# EAGLE board PCB (EAGLE 9.7.0)
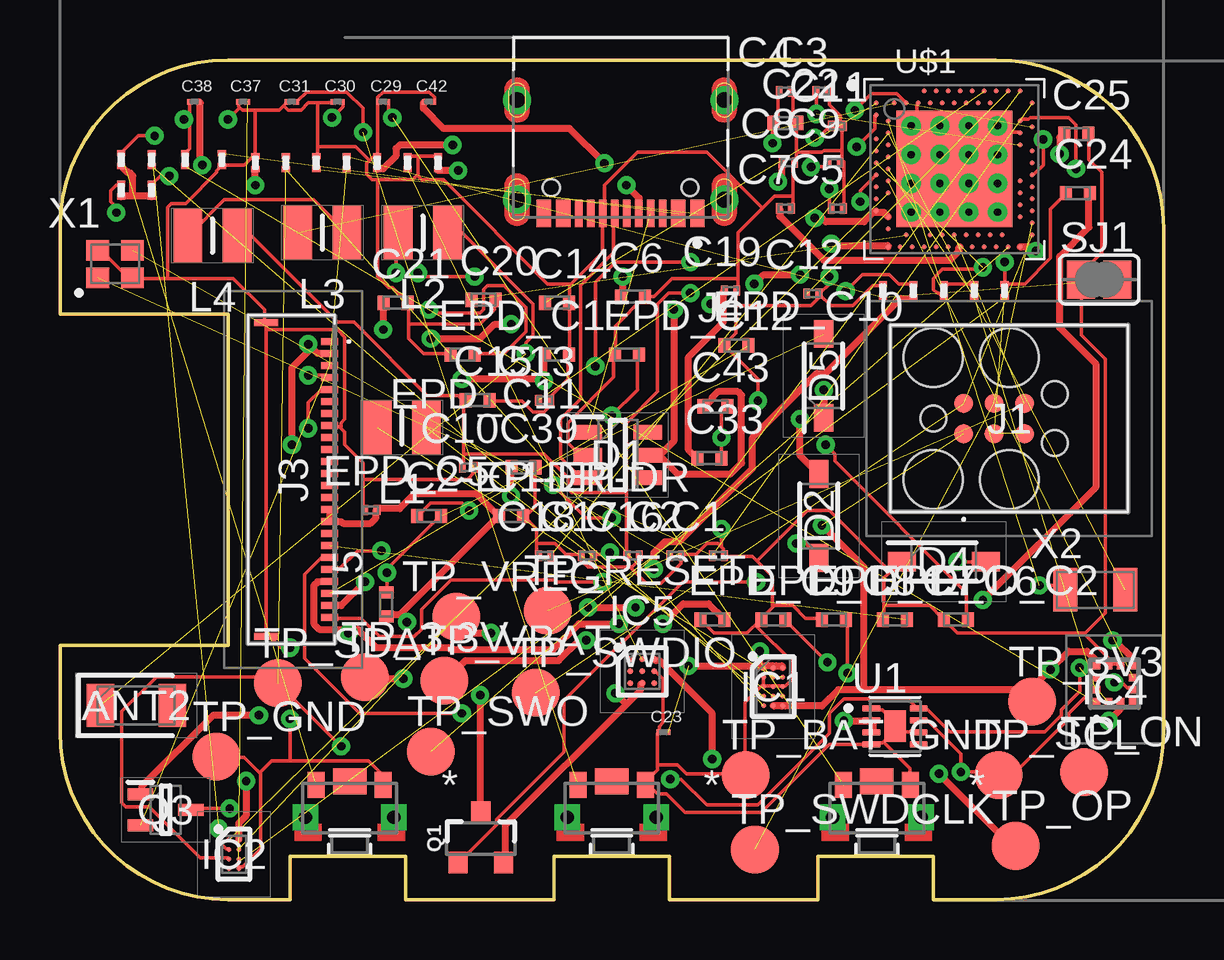
[diagram p0: board, top side]
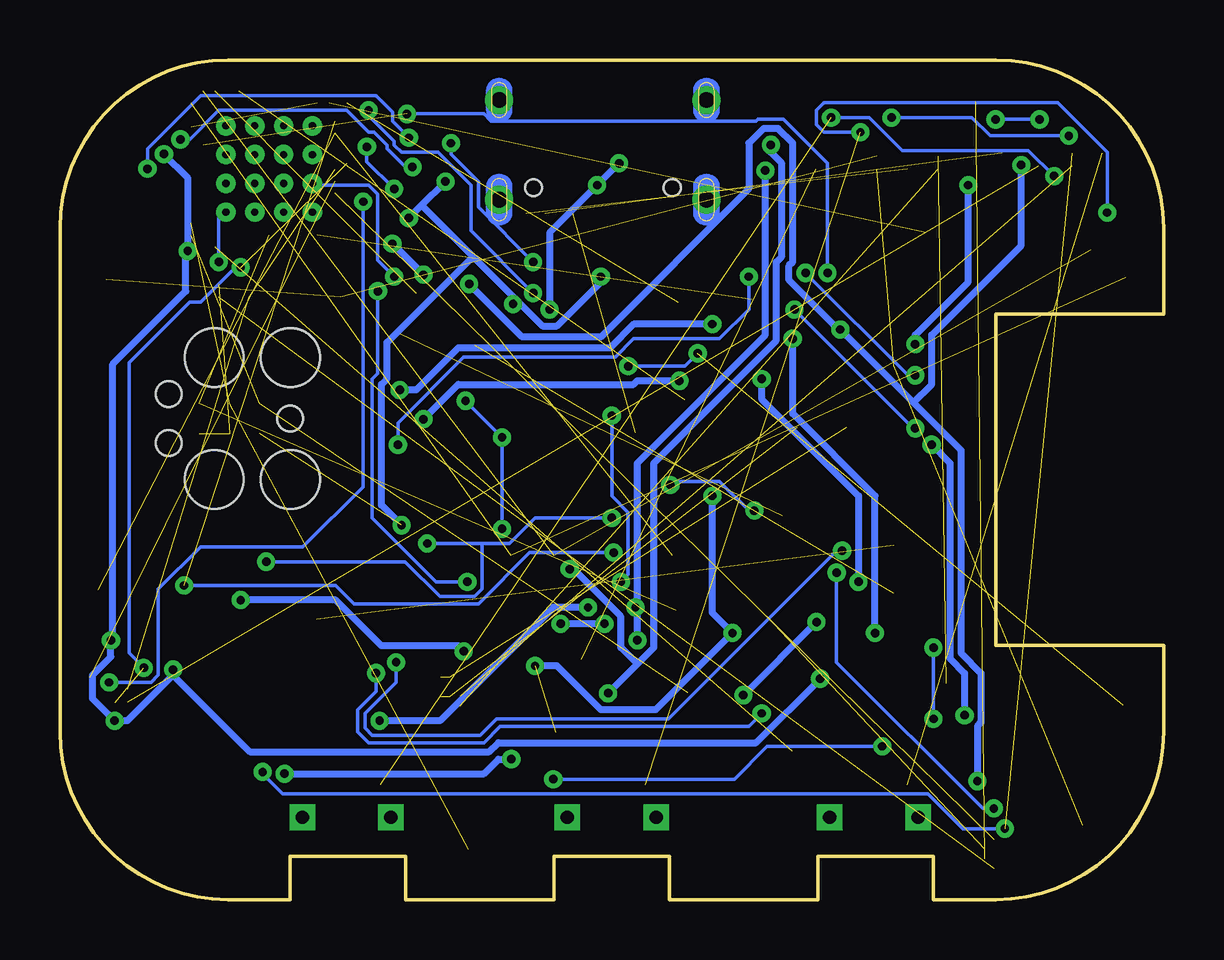
[diagram p1: board, bottom side, seen from below]

Size 46 x 35 mm. Coordinates in mm from the lower left corner, seen from the top.
Outline: 39,0 36.4,0 36.4,1.8 31.6,1.8 31.6,0 25.4,0 25.4,1.8 20.6,1.8 20.6,0 14.4,0 14.4,1.8 9.6,1.8 9.6,0 7,0 arc-90 0,7 0,10.6 7,10.6 7,24.4 0,24.4 0,28 arc-90 7,35 39,35 arc-90 46,28 46,7 arc-90 39,0
Copper layers (1*16): Top 0.035mm / dielectric 1.5mm / Bottom 0.035mm
Design rules "Fusion Electronics Design Rules": minimum track width 6mil, minimum drill 0.35mm, track to track 6mil, track to pad 6mil, pad to pad 6mil, via to via 6mil, smd to smd 6mil, copper to edge 40mil, drill to drill 6mil, minimum pad ring 10mil, minimum via ring 8mil, stop-mask expansion 4mil, vias tented up to drill 9999mil, thermal gap 10mil
Net classes: 1 POWER: width 0.3 mm

## Footprints (pad centres in the part's own frame; a part is rotated, then mirrored left to right if it is on the bottom)
2450AT18B100E_ANTC3216X140N = smd 1.15 x 1.8: 1 -1.5,0; 2 1.5,0
NORDIC_NRF_3_RESC0201_L = smd 0.28 x 0.43: 1 -0.255,0; 2 0.255,0
NORDIC_NRF_3_RESC0402_L = smd 0.5 x 0.6: 1 -0.5,0; 2 0.5,0
GRM011R60J152KE01L_2_CAPC0201X13N = smd 0.22 x 0.23: 1 -0.185,0; 2 0.185,0
GRM011R60J152KE01L_1_0201 = smd 0.35 x 0.25: 1 0,0.275; 2 0,-0.275
ESP32_C6_LIBRARY_3_SOT95P280X145-6N = smd 1.2 x 0.6: 1 -1.25,0.95; 2 -1.25,0; 3 -1.25,-0.95; 4 1.25,-0.95; 5 1.25,0; 6 1.25,0.95
ESP32_C6_LIBRARY_5_SOD3716X135N = smd 1.15 x 0.8: 1 -1.75,0; 2 1.75,0
RT6160AWSC_BGA15C40P3X5_140X230X60 = smd 0.216 x 0.216: A1 -0.4,0.8; A2 0,0.8; A3 0.4,0.8; B1 -0.4,0.4; B2 0,0.4; B3 0.4,0.4; C1 -0.4,0; C2 0,0; C3 0.4,0; D1 -0.4,-0.4; D2 0,-0.4; D3 0.4,-0.4; E1 -0.4,-0.8; E2 0,-0.8; E3 0.4,-0.8
BQ25180YBGR_BGA8C40P2X4_100X155X50 = smd 0.2 x 0.2: A1 -0.2,0.6; A2 0.2,0.6; B1 -0.2,0.2; B2 0.2,0.2; C1 -0.2,-0.2; C2 0.2,-0.2; D1 -0.2,-0.6; D2 0.2,-0.6
BMA423_BMA423 = smd 0.3 x 0.35: 1 -0.75,-0.775; 2 -0.25,-0.775; 3 0.25,-0.775; 4 0.75,-0.775; 7 0.75,0.775; 8 0.25,0.775; 9 -0.25,0.775; 10 -0.75,0.775 | smd 0.35 x 0.3: 5 0.775,-0.25; 6 0.775,0.25; 11 -0.775,0.25; 12 -0.775,-0.25
DRV2605YZFR_BGA9C50P3X3_144X144X62 = smd 0.25 x 0.25: A1 -0.5,0.5; A2 0,0.5; A3 0.5,0.5; B1 -0.5,0; B2 0,0; B3 0.5,0; C1 -0.5,-0.5; C2 0,-0.5; C3 0.5,-0.5
TC2030-IDC_TC2030IDC = smd 0.783 x 0.783: 1 -0.953,-0.635; 2 -0.953,0.635; 3 0.317,-0.635; 4 0.317,0.635; 5 1.588,-0.635; 6 1.588,0.635 | hole 2.451: -2.223,-2.54; -2.223,2.54; 0.952,-2.54; 0.952,2.54 | hole 1.067: -2.223,0; 2.857,-1.016; 2.857,1.016
503480-2400_5034802400 = smd 0.3 x 0.7: 1 -5.75,1.525; 2 -5.25,1.525; 3 -4.75,1.525; 4 -4.25,1.525; 5 -3.75,1.525; 6 -3.25,1.525; 7 -2.75,1.525; 8 -2.25,1.525; 9 -1.75,1.525; 10 -1.25,1.525; 11 -0.75,1.525; 12 -0.25,1.525; 13 0.25,1.525; 14 0.75,1.525; 15 1.25,1.525; 16 1.75,1.525; 17 2.25,1.525; 18 2.75,1.525; 19 3.25,1.525; 20 3.75,1.525; 21 4.25,1.525; 22 4.75,1.525; 23 5.25,1.525; 24 5.75,1.525 | smd 0.3 x 1: MP1 -6.54,-1.125; MP2 6.54,-1.125
KH-TYPE-C-16P_KINGHELM_KH-TYPE-C-16P = smd 0.6 x 1.15: A1_B12 -3.2,4.725; A4_B9 -2.4,4.725; A9_B4 2.4,4.725; A12_B1 3.2,4.725 | smd 0.3 x 1.15: A5 -1.25,4.725; A6 -0.25,4.725; A7 0.25,4.725; A8 1.25,4.725; B5 1.75,4.725; B6 0.75,4.725; B7 -0.75,4.725; B8 -1.75,4.725 | drill 0.65 pad 1.05: SH1 -4.32,0; SH2 4.32,0; SH3 -4.32,4.15; SH4 4.32,4.15 | hole 0.7: -2.89,3.65; 2.89,3.65
MLP2016SR47MT0S1_INDC2016X100N = smd 1.2 x 2.2: 1 -1.028,0; 2 1.028,0
NORDIC_NRF_2_RESC0402_L = smd 0.5 x 0.6: 1 -0.5,0; 2 0.5,0
ESP32_C6_LIBRARY_4_ESP32_C6_LIBRARY_4_ESP32_C6_LIBRARY_4_ESP32_C6_LIBRARY_4_ESP32_WROVER_SPARKFUN-DISCRETESEMI_SOT23-3 = smd 0.8 x 0.9: 1 -0.95,-1; 2 0.95,-1; 3 0,1.1
ESP32_C6_LIBRARY_6_SOT65P210X110-3N = smd 1.05 x 0.5: 1 -1.05,0.65; 2 -1.05,-0.65; 3 1.05,0
CPF0201D7K68C1_0201 = smd 0.35 x 0.25: 1 0,0.275; 2 0,-0.275
ESP32_C6_LIBRARY_7_JUMPER_SJ = smd 1.168 x 1.6: 1 -0.762,0; 2 0.762,0
2025-10-22_07-23-44_LIBRARY_SW_EVP-AKE31A_PAN = smd 0.711 x 1.092: 1 -1.4,-0.972; 2 1.4,-0.972 | drill 0.559 pad 0.914 square: 3 -1.848,0.381; 4 1.848,0.381 | smd 1.397 x 1.092: 5 0,-1.124
HECTOR_WATCH_1_TP20R = smd 2 x 2: TP 0,0
ESP32_C6_LIBRARY_SON50P200X200X80-9N = smd 0.76 x 0.27: 1 -0.985,0.75; 2 -0.985,0.25; 3 -0.985,-0.25; 4 -0.985,-0.75; 5 0.985,-0.75; 6 0.985,-0.25; 7 0.985,0.25; 8 0.985,0.75 | smd 0.9 x 1.3: 9 0,0
NORDIC_NRF_4_AQFN50P700X700X85_HS-74N = smd 4.85 x 4.85: P$74 0,0 | drill 0.3 pad 0.6: P$75 -1.8,1.8; P$76 -0.6,1.8; P$77 0.6,1.8; P$78 1.8,1.8; P$79 -1.8,0.6; P$80 -0.6,0.6; P$81 0.6,0.6; P$82 1.8,0.6; P$83 -1.8,-0.6; P$84 -0.6,-0.6; P$85 0.6,-0.6; P$86 1.8,-0.6; P$87 -1.8,-1.8; P$88 -0.6,-1.8; P$89 0.6,-1.8; P$90 1.8,-1.8 | smd 0.2 x 0.2: P$A8 -1.25,3.25; P$A10 -0.75,3.25; P$A12 -0.25,3.25; P$A14 0.25,3.25; P$A16 0.75,3.25; P$A18 1.25,3.25; P$A20 1.75,3.25; P$A22 2.25,3.25; P$A23 2.75,3.25; P$AA24 3.25,-2.25; P$AB2 -2.75,-2.5; P$AC5 -2,-2.75; P$AC9 -1,-2.75; P$AC11 -0.5,-2.75; P$AC13 0,-2.75; P$AC15 0.5,-2.75; P$AC17 1,-2.75; P$AC19 1.5,-2.75; P$AC21 2,-2.75; P$AC24 3.25,-2.75; P$AD2 -2.75,-3.25; P$AD4 -2.25,-3.25; P$AD6 -1.75,-3.25; P$AD8 -1.25,-3.25; P$AD10 -0.75,-3.25; P$AD12 -0.25,-3.25; P$AD14 0.25,-3.25; P$AD16 0.75,-3.25; P$AD18 1.25,-3.25; P$AD20 1.75,-3.25; P$AD22 2.25,-3.25; P$AD23 2.75,-3.25; P$B1 -3.25,2.75; P$B3 -2.5,2.75; P$B5 -2,2.75; P$B7 -1.5,2.75; P$B9 -1,2.75; P$B11 -0.5,2.75; P$B13 0,2.75; P$B15 0.5,2.75; P$B17 1,2.75; P$B19 1.5,2.75; P$B24 3.25,2.75; P$C1 -3.25,2.25; P$D2 -2.75,2; P$D23 2.75,2; P$E24 3.25,1.75; P$F2 -2.75,1.5; P$F23 2.75,1.5; P$G1 -3.25,1.25; P$H2 -2.75,1; P$H23 2.75,1; P$J1 -3.25,0.75; P$J24 3.25,0.75; P$K2 -2.75,0.5; P$L1 -3.25,0.25; P$L24 3.25,0.25; P$M2 -2.75,0; P$N1 -3.25,-0.25; P$N24 3.25,-0.25; P$P2 -2.75,-0.5; P$P23 2.75,-0.5; P$R1 -3.25,-0.75; P$R24 3.25,-0.75; P$T2 -2.75,-1; P$T23 2.75,-1; P$U1 -3.25,-1.25; P$U24 3.25,-1.25; P$V23 2.75,-1.5; P$W1 -3.25,-1.75; P$W24 3.25,-1.75; P$Y2 -2.75,-2; P$Y23 2.75,-2
NORDIC_NRF_BT-XTAL_2016_N = smd 0.95 x 0.85: 1 -0.725,-0.575; 2 0.725,-0.575; 3 0.725,0.575; 4 -0.725,0.575
NORDIC_NRF_1_XTAL_3215_N = smd 1 x 1.8: 1 -1.25,0; 2 1.25,0

## Placement (x,y rotation side)
ANT2  2450AT18B100E_2450AT18B100E  [2450AT18B100E_ANTC3216X140N]  3.18,8.09 0 top
C1  12pF  [NORDIC_NRF_3_RESC0201_L]  27.44,14.34 0 top
C1-EP-DR  10uF  [NORDIC_NRF_3_RESC0402_L]  18.81,15.99 0 top
C2  12pF  [NORDIC_NRF_3_RESC0201_L]  25.67,14.34 0 top
C2-EP-DR  4.7uF/25V  [NORDIC_NRF_3_RESC0402_L]  15.38,15.99 0 top
C3  1pF  [NORDIC_NRF_3_RESC0201_L]  31.76,33.69 0 top
C4  1pF  [NORDIC_NRF_3_RESC0201_L]  30.24,33.69 0 top
C5  100nF  [NORDIC_NRF_3_RESC0201_L]  32.4,28.81 0 top
C6  4.7uF  [NORDIC_NRF_3_RESC0402_L]  23.89,25.13 0 top
C7  100nF  [NORDIC_NRF_3_RESC0201_L]  30.24,28.81 0 top
C8  100nF  [NORDIC_NRF_3_RESC0201_L]  30.36,30.72 0 top
C9  820pF  [NORDIC_NRF_3_RESC0201_L]  32.27,30.72 0 top
C10  N.C  [NORDIC_NRF_3_RESC0201_L]  17.03,18.02 0 top
C11  100pF  [NORDIC_NRF_3_RESC0201_L]  32.4,32.24 0 top
C12  100nF  [NORDIC_NRF_3_RESC0201_L]  31.38,25.26 0 top
C13  N.C  [NORDIC_NRF_3_RESC0201_L]  20.21,20.81 0 top
C14  4.7uF  [NORDIC_NRF_3_RESC0402_L]  20.71,24.88 0 top
C15  1uF  [NORDIC_NRF_3_RESC0402_L]  17.41,20.81 0 top
C16  47nF  [NORDIC_NRF_3_RESC0201_L]  23.89,14.34 0 top
C17  12pF  [NORDIC_NRF_3_RESC0201_L]  21.98,14.34 0 top
C18  12pF  [NORDIC_NRF_3_RESC0201_L]  20.21,14.34 0 top
C19  100nF  [NORDIC_NRF_3_RESC0201_L]  27.95,25.39 0 top
C20  4.7uF  [NORDIC_NRF_3_RESC0402_L]  17.67,25.01 0 top
C21  4.7uF  [NORDIC_NRF_3_RESC0402_L]  13.98,24.88 0 top
C22  N.C  [NORDIC_NRF_3_RESC0402_L]  30.24,32.37 0 top
C23  0.1uF  [GRM011R60J152KE01L_2_CAPC0201X13N]  25.16,6.97 0 top
C24  10uF  [NORDIC_NRF_3_RESC0402_L]  42.43,29.45 0 top
C25  22uF  [NORDIC_NRF_3_RESC0402_L]  42.36,31.92 0 top
C27  0.1uF  [GRM011R60J152KE01L_1_0201]  15.76,30.72 0 top
C29  1uF  [GRM011R60J152KE01L_2_CAPC0201X13N]  13.47,33.26 0 top
C30  1uF  [GRM011R60J152KE01L_2_CAPC0201X13N]  11.57,33.26 0 top
C31  1uF  [GRM011R60J152KE01L_2_CAPC0201X13N]  9.66,33.26 0 top
C32  1uF  [GRM011R60J152KE01L_1_0201]  14.49,30.72 0 top
C33  22uF  [NORDIC_NRF_3_RESC0402_L]  27.06,18.4 0 top
C34  0.1uF  [GRM011R60J152KE01L_1_0201]  13.22,30.72 0 top
C37  1uF  [GRM011R60J152KE01L_2_CAPC0201X13N]  7.63,33.26 0 top
C38  1uF  [GRM011R60J152KE01L_2_CAPC0201X13N]  5.6,33.26 0 top
C39  10uF  [NORDIC_NRF_3_RESC0402_L]  19.32,18.02 0 top
C42  0.1uF  [GRM011R60J152KE01L_2_CAPC0201X13N]  15.38,33.26 0 top
C43  4.7uF\  [NORDIC_NRF_3_RESC0402_L]  27.32,20.56 0 top
D1  ESP32_C6_LIBRARY_3_USBLC6-2SC6Y  [ESP32_C6_LIBRARY_3_SOT95P280X145-6N]  23.25,18.53 0 top
D2  MBR0530  [ESP32_C6_LIBRARY_5_SOD3716X135N]  31.64,15.99 90 top
D4  MBR0530  [ESP32_C6_LIBRARY_5_SOD3716X135N]  36.84,14.08 0 top
D5  MBR0530  [ESP32_C6_LIBRARY_5_SOD3716X135N]  31.83,21.83 90 top
EPD_C1  1uF/50V  [NORDIC_NRF_3_RESC0402_L]  16.78,22.72 0 top
EPD_C2  1uF/50V  [NORDIC_NRF_3_RESC0402_L]  37.35,11.67 0 top
EPD_C5  0.1uF/50V  [NORDIC_NRF_3_RESC0201_L]  12.97,16.24 0 top
EPD_C6  1uF/50V  [NORDIC_NRF_3_RESC0402_L]  34.81,11.67 0 top
EPD_C7  1uF/50V  [NORDIC_NRF_3_RESC0402_L]  32.27,11.67 0 top
EPD_C8  1uF/50V  [NORDIC_NRF_3_RESC0402_L]  29.73,11.67 0 top
EPD_C9  1uF/50V  [NORDIC_NRF_3_RESC0402_L]  27.19,11.67 0 top
EPD_C10  1uF/50V  [NORDIC_NRF_3_RESC0402_L]  28.21,23.1 0 top
EPD_C11  1uF/50V  [NORDIC_NRF_3_RESC0402_L]  20.71,22.72 180 top
EPD_C12  1uF/50V  [NORDIC_NRF_3_RESC0402_L]  23.63,22.72 0 top
IC1  RT6160AWSC_RT6160AWSC  [RT6160AWSC_BGA15C40P3X5_140X230X60]  29.73,8.88 0 top
IC2  BQ25180YBGR_BQ25180YBGR  [BQ25180YBGR_BGA8C40P2X4_100X155X50]  7.25,1.89 0 top
IC4  BMA423_BMA423  [BMA423_BMA423]  43.96,9 0 top
IC5  DRV2605YZFR_DRV2605YZFR  [DRV2605YZFR_BGA9C50P3X3_144X144X62]  24.27,9.51 0 top
J1  TC2030-IDC_TC2030-IDC  [TC2030-IDC_TC2030IDC]  38.62,20.05 0 top
J3  503480-2400_503480-2400  [503480-2400_5034802400]  9.72,17.51 270 top
J4  KH-TYPE-C-16P_KH-TYPE-C-16PUSB  [KH-TYPE-C-16P_KINGHELM_KH-TYPE-C-16P]  23.37,33.33 180 top
L1  MLP2016SR47MT0S1_FTC252012SR47MBCA  [MLP2016SR47MT0S1_INDC2016X100N]  14.25,19.67 0 top
L2  3.9nH  [MLP2016SR47MT0S1_INDC2016X100N]  15.13,27.8 0 top
L3  10uH  [MLP2016SR47MT0S1_INDC2016X100N]  10.93,27.8 0 top
L4  15nH  [MLP2016SR47MT0S1_INDC2016X100N]  6.36,27.67 0 top
L5  68uH  [NORDIC_NRF_2_RESC0402_L]  13.6,12.31 90 top
Q1  20V/4.2A/52mΩ/1.4W  [ESP32_C6_LIBRARY_4_ESP32_C6_LIBRARY_4_ESP32_C6_LIBRARY_4_ESP32_C6_LIBRARY_4_ESP32_WROVER_SPARKFUN-DISCRETESEMI_SOT23-3]  17.54,2.54 0 top
Q3  SI1308EDL-T1-GE3  [ESP32_C6_LIBRARY_6_SOT65P210X110-3N]  4.41,3.75 0 top
R1_EP_DR  0.47  [CPF0201D7K68C1_0201]  11.95,30.72 0 top
R1_USB  5K1  [CPF0201D7K68C1_0201]  10.68,30.72 0 top
R2  0  [CPF0201D7K68C1_0201]  9.41,30.72 0 top
R2_EP_DR  10K  [CPF0201D7K68C1_0201]  8.14,30.72 0 top
R2_USB  5K1  [CPF0201D7K68C1_0201]  6.74,30.85 0 top
R3  0  [CPF0201D7K68C1_0201]  5.22,30.85 0 top
R4  0  [CPF0201D7K68C1_0201]  3.82,30.85 0 top
R5  10K  [CPF0201D7K68C1_0201]  2.55,30.85 0 top
R7  10K  [CPF0201D7K68C1_0201]  3.82,29.58 0 top
R8  10K  [CPF0201D7K68C1_0201]  2.55,29.58 0 top
R9  10K  [CPF0201D7K68C1_0201]  39.38,25.39 0 top
R17  3K3  [CPF0201D7K68C1_0201]  38.11,25.39 0 top
R18  3K3\  [CPF0201D7K68C1_0201]  36.84,25.39 0 top
R_PWR_EPD  10K  [CPF0201D7K68C1_0201]  35.57,25.39 0 top
R_TYPE_SEL  2.2  [CPF0201D7K68C1_0201]  34.3,25.39 0 top
SJ1  0  [ESP32_C6_LIBRARY_7_JUMPER_SJ]  43.32,25.84 0 top
SW_DN  2025-10-22_07-23-44_LIBRARY_EVP-AKE31ASW_EVP-AKE31A_PAN  [2025-10-22_07-23-44_LIBRARY_SW_EVP-AKE31A_PAN]  34.05,3.81 180 top
SW_ENT  2025-10-22_07-23-44_LIBRARY_EVP-AKE31ASW_EVP-AKE31A_PAN  [2025-10-22_07-23-44_LIBRARY_SW_EVP-AKE31A_PAN]  23,3.81 180 top
SW_UP  2025-10-22_07-23-44_LIBRARY_EVP-AKE31ASW_EVP-AKE31A_PAN  [2025-10-22_07-23-44_LIBRARY_SW_EVP-AKE31A_PAN]  12.08,3.81 180 top
TP_3.3V  HECTOR_WATCH_1_TPTP20R  [HECTOR_WATCH_1_TP20R]  12.71,9.27 0 top
TP_3V3  HECTOR_WATCH_1_TPTP20R  [HECTOR_WATCH_1_TP20R]  40.53,8.24 0 top
TP_BAT_GND  HECTOR_WATCH_1_TPTP20R  [HECTOR_WATCH_1_TP20R]  28.59,5.19 0 top
TP_GND  HECTOR_WATCH_1_TPTP20R  [HECTOR_WATCH_1_TP20R]  6.52,5.95 0 top
TP_ON  HECTOR_WATCH_1_TPTP20R  [HECTOR_WATCH_1_TP20R]  42.68,5.32 0 top
TP_OP  HECTOR_WATCH_1_TPTP20R  [HECTOR_WATCH_1_TP20R]  39.83,2.24 0 top
TP_RESET  HECTOR_WATCH_1_TPTP20R  [HECTOR_WATCH_1_TP20R]  20.33,12.05 0 top
TP_SCL  HECTOR_WATCH_1_TPTP20R  [HECTOR_WATCH_1_TP20R]  39.13,5.19 0 top
TP_SDA  HECTOR_WATCH_1_TPTP20R  [HECTOR_WATCH_1_TP20R]  9.08,9.02 0 top
TP_SWDCLK  HECTOR_WATCH_1_TPTP20R  [HECTOR_WATCH_1_TP20R]  28.97,2.09 0 top
TP_SWDIO  HECTOR_WATCH_1_TPTP20R  [HECTOR_WATCH_1_TP20R]  19.82,8.62 0 top
TP_SWO  HECTOR_WATCH_1_TPTP20R  [HECTOR_WATCH_1_TP20R]  15.47,6.17 0 top
TP_VBAT  HECTOR_WATCH_1_TPTP20R  [HECTOR_WATCH_1_TP20R]  16.01,9.13 0 top
TP_VREG  HECTOR_WATCH_1_TPTP20R  [HECTOR_WATCH_1_TP20R]  16.52,11.8 0 top
U1  ESP32_C6_LIBRARY_MAX17048G+T10  [ESP32_C6_LIBRARY_SON50P200X200X80-9N]  34.81,7.23 0 top
U$1  NORDIC_NRF_4_NRF52840_QF  [NORDIC_NRF_4_AQFN50P700X700X85_HS-74N]  37.28,30.46 0 top
X1  32MHz  [NORDIC_NRF_BT-XTAL_2016_N]  2.3,26.49 0 top
X2  32.768KHz  [NORDIC_NRF_1_XTAL_3215_N]  43.16,12.91 0 top

## Library data of the parts
ANT2 = InkTime_v5; ARROW_PART_NUMBER: 2450AT18B100E; ARROW_PRICE-STOCK: https://www.arrow.com/en/products/2450at18b100e/johanson-dielectrics?utm_currency=USD&region=nac; DESCRIPTION: Antennas 2.45GHz ANTENNA; HEIGHT: 1.4mm; MANUFACTURER_NAME: JOHANSON TECHNOLOGY; MANUFACTURER_PART_NUMBER: 2450AT18B100E; MOUSER_PART_NUMBER: 609-2450AT18B100E; MOUSER_PRICE-STOCK: https://www.mouser.co.uk/ProductDetail/Johanson-Technology/2450AT18B100E?qs=yCnrNFeXz%252Bh5MFsFIXGZGA%3D%3D
C1 C1-EP-DR C2 C2-EP-DR C3-C22 C24 C25 C27 C32-C34 C39 C43 EPD_C1 EPD_C2 EPD_C5-EPD_C12 J4 L5 R1_EP_DR R1_USB R2 R2_EP_DR R2_USB R3-R5 R7-R9 R17 R18 R_PWR_EPD R_TYPE_SEL SJ1 TP_3.3V TP_3V3 TP_BAT_GND TP_GND TP_ON TP_OP TP_RESET TP_SCL TP_SDA TP_SWDCLK TP_SWDIO TP_SWO TP_VBAT TP_VREG U$1 X1 X2 = InkTime_v5
C23 C29-C31 C37 C38 C42 = InkTime_v5; AVAILABILITY: In Stock; CHECK_PRICES: https://www.snapeda.com/parts/GRM011R60J152KE01L/Murata/view-part/?ref=eda; DESCRIPTION: SMD Capacitor X5R(EIA) with Capacitance: 1500pF Tol. 10%. Rated Voltage: 6.3Vdc; MF: Murata; MP: GRM011R60J152KE01L; PACKAGE: 0201 Murata; PRICE: None; SNAPEDA_LINK: https://www.snapeda.com/parts/GRM011R60J152KE01L/Murata/view-part/?ref=snap
D1 = InkTime_v5; AVAILABILITY: In Stock; CHECK_PRICES: https://www.snapeda.com/parts/USBLC6-2SC6Y/STMicroelectronics/view-part/?ref=eda; DESCRIPTION: 17V Clamp 5A (8/20µs) Ipp Tvs Diode Surface Mount SOT-23-6; MF: STMicroelectronics; MP: USBLC6-2SC6Y; PACKAGE: SOT-23-6 STMicroelectronics; PRICE: None; SNAPEDA_LINK: https://www.snapeda.com/parts/USBLC6-2SC6Y/STMicroelectronics/view-part/?ref=snap
D2 D4 D5 = InkTime_v5; AVAILABILITY: In Stock; CHECK_PRICES: https://www.snapeda.com/parts/MBR0530/Onsemi/view-part/?ref=eda; DESCRIPTION: Diode Schottky 30 V 500mA Surface Mount SOD-123; MF: ON Semiconductor; MP: MBR0530; PACKAGE: SOD-123-2 ON Semiconductor; PRICE: None; PURCHASE-URL: https://www.snapeda.com/api/url_track_click_mouser/?unipart_id=179458&manufacturer=ON Semiconductor&part_name=MBR0530&search_term=None; SNAPEDA_LINK: https://www.snapeda.com/parts/MBR0530/Onsemi/view-part/?ref=snap
IC1 = InkTime_v5; DESCRIPTION: Buck-Boost Regulator Positive Output Step-Up/Step-Down I2C DC-DC Controller IC 15-WL-CSP (BSC) (1.4x2.3); HEIGHT: 0.6mm; MANUFACTURER_NAME: RICHTEK; MANUFACTURER_PART_NUMBER: RT6160AWSC; MOUSER_PART_NUMBER: 835-RT6160AWSC; MOUSER_PRICE-STOCK: https://www.mouser.co.uk/ProductDetail/Richtek/RT6160AWSC?qs=amGC7iS6iy%2FLd9PSoixZXQ%3D%3D
IC2 = InkTime_v5; ARROW_PART_NUMBER: BQ25180YBGR; ARROW_PRICE-STOCK: https://www.arrow.com/en/products/bq25180ybgr/texas-instruments?utm_currency=USD&region=nac; DESCRIPTION: Charger IC Lithium Ion/Polymer, Lithium Iron Phosphate 8-DSBGA (1.6x1.1); HEIGHT: 0.5mm; MANUFACTURER_NAME: Texas Instruments; MANUFACTURER_PART_NUMBER: BQ25180YBGR; MOUSER_PART_NUMBER: 595-BQ25180YBGR; MOUSER_PRICE-STOCK: https://www.mouser.co.uk/ProductDetail/Texas-Instruments/BQ25180YBGR?qs=doiCPypUmgEWjAK%252BJAX6Tw%3D%3D
IC4 = InkTime_v5; ARROW_PART_NUMBER: BMA423; ARROW_PRICE-STOCK: https://www.arrow.com/en/products/bma423/bosch; DESCRIPTION: Accelerometers Triaxial low-g 12bit Acceleration Sensor; HEIGHT: 1mm; MANUFACTURER_NAME: BOSCH; MANUFACTURER_PART_NUMBER: BMA423; MOUSER_PART_NUMBER: 262-BMA423; MOUSER_PRICE-STOCK: https://www.mouser.co.uk/ProductDetail/Bosch-Sensortec/BMA423?qs=HXFqYaX1Q2xC%252BSgeGoX3mg%3D%3D
IC5 = InkTime_v5; ARROW_PART_NUMBER: DRV2605YZFR; ARROW_PRICE-STOCK: https://www.arrow.com/en/products/drv2605yzfr/texas-instruments?region=nac; DESCRIPTION: Haptic Driver for ERM/LRA with Built-In Library and Smart Loop Architecture; HEIGHT: 0.625mm; MANUFACTURER_NAME: Texas Instruments; MANUFACTURER_PART_NUMBER: DRV2605YZFR
J1 = InkTime_v5; DESCRIPTION: CABLE ADAPTER 6 POS; HEIGHT: 19mm; MANUFACTURER_NAME: Tag Connect; MANUFACTURER_PART_NUMBER: TC2030-IDC
J3 = InkTime_v5; DESCRIPTION: FFC & FPC Connectors 0.5mm FPC RA SMT Dual Contact 24Ckt; HEIGHT: 1.87mm; MANUFACTURER_NAME: Molex; MANUFACTURER_PART_NUMBER: 503480-2400; MOUSER_PART_NUMBER: 538-503480-2400; MOUSER_PRICE-STOCK: https://www.mouser.co.uk/ProductDetail/Molex/503480-2400?qs=OAhjpuo3Vu7efIoxFh9AOw%3D%3D
L1-L4 = InkTime_v5; DESCRIPTION: SMD / SMT Inductors (Coils), L=0.47?H, L x W x T :; HEIGHT: 1mm; JLCPCB: https://jlcpcb.com/partdetail/6763488-FTC252012SR47MBCA/C5832368; MANUFACTURER_NAME: TDK; MANUFACTURER_PART_NUMBER: FTC252012SR47MBCA
Q1 = InkTime_v5; PROD_ID: TRAN-14388
Q3 = InkTime_v5; AVAILABILITY: In Stock; CHECK_PRICES: https://www.snapeda.com/parts/SI1308EDL-T1-GE3/Vishay+Siliconix/view-part/?ref=eda; DESCRIPTION: Si1308EDL-T1-GE3 N-channel MOSFET Transistor, 1.5 A, 30 V, 3-Pin SC-70 | Siliconix / Vishay SI1308EDL-T1-GE3; MF: Vishay Siliconix; MP: SI1308EDL-T1-GE3; PACKAGE: SOT-323 Vishay Semiconductor; PRICE: None; PURCHASE-URL: https://www.snapeda.com/api/url_track_click_mouser/?unipart_id=274603&manufacturer=Vishay Siliconix&part_name=SI1308EDL-T1-GE3&search_term=None; SNAPEDA_LINK: https://www.snapeda.com/parts/SI1308EDL-T1-GE3/Vishay+Siliconix/view-part/?ref=snap
SW_DN SW_ENT SW_UP = InkTime_v5; COPYRIGHT: Copyright (C) 2025 Ultra Librarian. All rights reserved.; DIGI-KEY_PART_NUMBER_1: P123437TR-ND; DIGI-KEY_PART_NUMBER_2: P123437CT-ND; DIGI-KEY_PART_NUMBER_3: P123437DKR-ND; MANUFACTURER_NAME: Panasonic; MANUFACTURER_PART_NUMBER: EVP-AKE31A
U1 = InkTime_v5; AVAILABILITY: In Stock; CHECK_PRICES: https://www.snapeda.com/parts/MAX17048G+T10/Analog+Devices/view-part/?ref=eda; DESCRIPTION: 3µA 1-Cell/2-Cell Fuel Gauge with ModelGauge; MF: Analog Devices; MP: MAX17048G+T10; PACKAGE: TDFN-8 Maxim; PRICE: None; PURCHASE-URL: https://www.snapeda.com/api/url_track_click_mouser/?unipart_id=329239&manufacturer=Analog Devices&part_name=MAX17048G+T10&search_term=None; SNAPEDA_LINK: https://www.snapeda.com/parts/MAX17048G+T10/Analog+Devices/view-part/?ref=snap

## Nets
3V3/1.7D [POWER]: C34.2 IC5.C2 Q1.2 R_PWR_EPD.2
3V3/1.7D1 [POWER]: R5.2 R7.2 R8.2
3V3/2.4A [POWER]: C6.1 C8.1 C19.1 C25.1 C33.1 IC1.E2 IC1.E3 IC4.3 IC4.7 IC4.10 J1.1 TP_3.3V.TP TP_3V3.TP U$1.P$AD23 U$1.P$W1 U$1.P$Y2
ALERT/1.6C: U1.5
ALERT/2.5C: U$1.P$J24
D+/1.5D: D1.4
D+/2.7D: U$1.P$AD6
D-/1.5D: D1.6
D-/2.7D: U$1.P$AD4
DEC1: C5.1 U$1.P$C1
DEC4_6: C10.1 C15.1 C16.1 L4.2 U$1.P$B5 U$1.P$E24
DN: D1.1 J4.A5
DP: D1.3 J4.A7
EPD_3V3 [POWER]: C1-EP-DR.1 EPD_C5.2 J3.15 J3.16 L5.1 Q1.3
EPD_BUSY/1.5D: J3.9
EPD_BUSY/2.2D: U$1.P$AD12
EPD_CS/1.4C: J3.12
EPD_CS/2.2D: U$1.P$K2
EPD_DC/1.5D: J3.11
EPD_DC/2.2D: U$1.P$AD10
EPD_RST/1.5D: J3.10
EPD_RST/2.2D: U$1.P$AC11
GDR [POWER]: J3.2 Q3.1 R2_EP_DR.2
GND: C1-EP-DR.2 C1.2 C2.2 C3.2 C4.2 C5.2 C6.2 C7.2 C8.2 C9.2 C10.2 C11.2 C12.2 C13.2 C14.2 C15.2 C16.2 C17.1 C18.1 C19.2 C20.2 C21.2 C22.2 C23.1 C24.1 C25.2 C27.1 C29.1 C30.1 C31.1 C32.1 C33.2 C34.1 C37.1 C38.1 C39.2 C42.2 C43.2 D1.2 D4.1 EPD_C1.1 EPD_C2.1 EPD_C5.1 EPD_C6.1 EPD_C7.1 EPD_C8.1 EPD_C9.1 EPD_C10.1 EPD_C11.1 EPD_C12.1 IC1.B1 IC1.C1 IC1.C2 IC1.C3 IC2.D2 IC4.8 IC4.9 IC5.B3 J1.3 J1.5 J3.8 J3.MP1 J3.MP2 J4.B6 R1_USB.1 R2_EP_DR.1 R2_USB.2 R3.1 R9.1 R_TYPE_SEL.1 SJ1.1 SW_DN.1 SW_ENT.1 SW_UP.1 TP_BAT_GND.TP TP_GND.TP U1.1 U1.4 U1.6 U1.9 U$1.P$74 U$1.P$75 U$1.P$76 U$1.P$77 U$1.P$78 U$1.P$79 U$1.P$80 U$1.P$81 U$1.P$82 U$1.P$83 U$1.P$84 U$1.P$85 U$1.P$86 U$1.P$87 U$1.P$88 U$1.P$89 U$1.P$90 U$1.P$B7 U$1.P$F23 X1.2 X1.4
HAPTIC_EN/1.4C: IC5.A1
HAPTIC_EN/2.6A: U$1.P$U1
IMU_INT1: IC4.5 U$1.P$N1
IMU_INT2: IC4.6 U$1.P$P2
LX1 [POWER]: IC1.B2 IC1.B3 L1.1
LX2 [POWER]: IC1.D2 IC1.D3 L1.2
MOSI/1.5B: J3.14
MOSI/2.2D: U$1.P$B13
N$1: C11.1 U$1.P$D23
N$2: C3.1 L2.1 U$1.P$H23
N$3 [POWER]: C7.1 U$1.P$AD14
N$4: C1.1 U$1.P$B24 X1.1
N$5: C2.1 U$1.P$A23 X1.3
N$6: C20.1 U$1.P$AC5
N$7: IC5.B1
N$8: C9.1 U$1.P$N24
N$9: C14.1 U$1.P$B1
N$10: L3.1 U$1.P$B3
N$11: U$1.P$AD18
N$12: L3.2 L4.1
N$13: C13.1 U$1.P$A18
N$14: C12.1 U$1.P$A22
N$15: IC4.1 R3.2
N$16: IC1.D1 R4.2
N$17: IC1.E1 R2.2
N$18: R17.1 R18.1
N$19: IC2.D1 R9.2
N$20: C2-EP-DR.2 D5.2 L5.2 Q3.3
N$21: C2-EP-DR.1 D2.1 D4.2
N$22: R1_EP_DR.1 R_TYPE_SEL.2 SJ1.2
N$23: EPD_C2.2 J3.4
N$24: J3.17
N$25: EPD_C1.2 J3.5
N$26: EPD_C6.2 J3.18
N$27: EPD_C7.2 J3.19
N$28: EPD_C8.2 J3.20
N$29: EPD_C10.2 J3.22
N$30: EPD_C12.2 J3.24
N$31: C32.2 IC5.A2
N$32: J4.A1_B12 R1_USB.2
N$33: J4.A4_B9 R2_USB.1
N$34: J4.A9_B4
N$35: J4.A8
N$36: J4.A6
OUT: IC5.C3
OUT+ [POWER]: IC5.A3 TP_OP.TP
OUT- [POWER]: TP_ON.TP
P0.00/XL1: C17.2 U$1.P$D2 X2.1
P0.01/XL2: C18.2 U$1.P$F2 X2.2
P0.04: U$1.P$J1
P0.09: U$1.P$L24
P0.13/1.5D: C30.2 R5.1 SW_UP.2
P0.14/1.5D: C31.2 R8.1 SW_ENT.2
P0.26: U$1.P$G1
P0.27: U$1.P$H2
P0.28: U$1.P$B11
P0.29: U$1.P$A10
P0.30: U$1.P$B9
P0.31: U$1.P$A8
P1.01/1.6C: Q1.1 R_PWR_EPD.1
P1.01/2.4B: U$1.P$Y23
P1.02/1.6C: C29.2 R7.1 SW_DN.2
P1.02/2.8C: U$1.P$W24
P1.03: U$1.P$V23
P1.04: U$1.P$U24
P1.05: U$1.P$T23
P1.06: U$1.P$R24
P1.07: U$1.P$P23
P1.09: U$1.P$R1
P1.10: U$1.P$A20
P1.11: U$1.P$B19
P1.12: U$1.P$B17
P1.13: U$1.P$A16
P1.14: U$1.P$B15
P1.15: U$1.P$A14
PMIC_INT: IC2.A1 U$1.P$T2
PO.13/2.6C: U$1.P$AD8
PO.14/2.7C: U$1.P$AC9
PO.19: U$1.P$AC15
PO.20: U$1.P$AD16
PO.21: U$1.P$AC17
PO.22: U$1.P$AC19
PO.24: U$1.P$AD20
PO.25: U$1.P$AC21
PREVGH [POWER]: D5.1 EPD_C9.2 J3.21
PREVGL [POWER]: D2.2 EPD_C11.2 J3.23
RESE: J3.3 Q3.2 R1_EP_DR.2
RESET: J1.6 TP_RESET.TP U$1.P$AC13
RF: ANT2.1 C4.1 C22.1 L2.2
SCK/1.5B: J3.13
SCK/2.2D: U$1.P$A12
SCL/1.4C: IC5.C1
SCL/2.4C: IC2.B1 IC4.12 R4.1 R17.2 TP_SCL.TP U1.7 U$1.P$M2
SDA/1.4C: IC5.B2
SDA/2.4C: IC2.C1 IC4.2 R2.1 R18.2 TP_SDA.TP U1.8 U$1.P$L1
SWDCLK: J1.4 TP_SWDCLK.TP U$1.P$AA24
SWDIO: J1.2 TP_SWDIO.TP U$1.P$AC24
SWO: TP_SWO.TP U$1.P$AD22
VBAT/1.2A [POWER]: C27.2 TP_VBAT.TP U1.2 U1.3
VBAT/2.5C [POWER]: C37.2 IC2.C2
VBUS/1.5D [POWER]: C42.1 C43.1 D1.5 J4.B7
VBUS/2.6D [POWER]: C21.1 C38.2 IC2.A2 U$1.P$AD2
VREG [POWER]: C23.2 C24.2 C39.1 IC1.A1 IC1.A2 IC1.A3 IC2.B2 TP_VREG.TP

## Tracks (layer width: path | path; a pad name or v marks a point on that pad's centre or on a via)
3V3/1.7D  (via drill 0.35)
  Top 0.3: 23.61,8.14 18.58,3.11 18.58,1.66 18.5,1.59 Q1.2 | 23.61,8.14 24.22,8.75 24.22,8.98 IC5.C2 | v16.37,31.46 14.16,31.46 14.01,31.3 14.01,31 13.47,30.47 13.25,30.47 C34.2 | 23.61,8.14 v23.15,8.6 | v24.75,13.78 24.75,14.46 25.21,14.92 25.82,14.92 28.87,17.97 28.87,19.27 31.53,21.93 31.91,21.93 35.04,25.06 35.57,25.06 R_PWR_EPD.2
  Bottom 0.3: v16.37,31.46 16.37,31.15 15.91,30.7 15.91,26.81 16.14,26.58 16.14,23.3 21.25,18.2 21.25,10.5 21.93,9.82 | v23.15,8.6 21.93,9.82 | v24.75,13.78 24.6,13.78 22.62,11.8 22.62,10.5 21.93,9.82
3V3/1.7D1
  Top 0.3: 3.04,29.32 3.8,29.32 R7.2 | 3.04,29.32 2.58,29.32 R8.2 | 3.04,29.32 3.04,30.16 2.88,30.31 2.81,30.31 2.58,30.54 R5.2
3V3/2.4A  (via drill 0.35)  (1 unrouted)
  Top 0.3: 27.65,24.83 27.65,24.06 26.2,22.62 26.2,18.73 26.5,18.43 C33.1 | 27.65,24.83 27.65,25.36 C19.1 | 34.04,28.68 34.05,28.64 34.35,28.64 34.5,28.48 U$1.P$Y2 | 34.04,28.68 U$1.P$W1 | v29.93,29.93 30.09,30.09 30.09,30.7 C8.1 | v31.46,28.41 31.76,28.41 31.91,28.26 33.52,28.26 33.9,28.64 34.04,28.68 | v23.46,25.97 23.46,25.13 C6.1 | v27.11,24.83 27.65,24.83 | v40.68,27.04 40.53,27.19 40.07,27.19 U$1.P$AD23 | v41.67,31.08 41.67,31.76 41.82,31.91 C25.1 | IC1.E2 29.78,8.06 30.09,8.06 IC1.E3 30.24,8.06 31.76,8.06 32.45,8.75 33.52,8.75 | 33.52,8.75 40.07,8.75 40.53,8.29 TP_3V3.TP 40.3,8.6 v41.29,9.59 42.05,10.35 42.81,10.35 43.19,9.97 43.19,9.82 IC4.10 | v43.72,7.45 44.18,7.91 44.18,8.22 IC4.3 | v43.88,10.81 43.95,10.81 44.72,10.04 44.72,9.82 IC4.7 | v14.31,9.21 12.71,9.21 TP_3.3V.TP | v31.76,15.61 33.52,13.85 33.52,8.75
  Bottom 0.3: v31.46,28.41 30.92,28.94 | 30.92,28.94 v29.93,29.93 | v23.46,25.97 23.46,25.74 25.29,23.91 25.89,23.91 26.96,24.98 | 30.92,28.94 28.79,26.81 | 28.79,26.81 26.96,24.98 | v27.11,24.83 26.96,24.98 | v41.67,31.08 40.68,30.09 v40.68,27.04 40.75,26.96 40.75,25.36 43.8,22.31 43.8,10.88 v43.88,10.81 43.88,10.12 44.64,9.36 44.64,8.37 v43.72,7.45 43.19,7.45 41.29,9.36 v41.29,9.59 41.21,9.28 38.09,6.16 28.1,6.16 27.72,6.54 16.98,6.54 v14.31,9.21 | 28.79,26.81 32.37,23.23 32.37,21.7 32.6,21.47 32.6,16.45 v31.76,15.61
DEC1  (via drill 0.35)
  Top 0.152: v33.21,31.38 33.97,32.14 33.97,32.68 U$1.P$C1 | v32.07,29.63 32.07,28.87 C5.1
  Bottom 0.152: v33.21,31.38 33.21,30.77 v32.07,29.63
DEC4_6  (via drill 0.35)  (1 unrouted)
  Top 0.152: 16.83,18.58 16.83,20.71 16.9,20.79 C15.1 16.83,20.79 16.6,21.02 15.3,21.02 12.25,24.06 11.57,24.06 7.99,27.65 7.45,27.65 L4.2 | 16.83,18.58 16.83,18.05 C10.1 | v33.13,32.9 33.82,33.59 34.89,33.59 35.27,33.21 U$1.P$B5 | v26.28,25.28 25.36,25.28 24.9,24.83 24.9,21.17 23.61,19.87 23.61,16.98 | 23.61,16.98 23.61,14.39 C16.1 | 16.83,18.58 20.18,18.58 21.17,17.59 21.17,17.13 21.32,16.98 23.61,16.98
  Bottom 0.152: v33.13,32.9 33.13,32.68 32.07,31.61 32.07,31.46 31.76,31.15 30.24,31.15 28.87,29.78 28.87,27.88 v26.28,25.28
DN  (1 unrouted)
DP
  Top 0.152: J4.A7 23.07,28.56 23.07,26.96 21.7,25.59 21.7,20.87 20.86,20.03 20.86,18.43 21.7,17.59 21.93,17.59 D1.3
EPD_3V3  (via drill 0.35)
  Top 0.3: J3.15 11.26,16.22 11.26,15.84 J3.16 11.26,15.76 11.72,15.76 11.8,15.68 12.94,15.68 13.17,15.91 13.17,16.22 EPD_C5.2 13.32,16.29 14.16,16.29 14.77,16.9 17.36,16.9 18.2,16.06 C1-EP-DR.1 18.28,15.99 14.16,11.87 | 14.16,11.87 13.63,11.87 L5.1 | v17.51,8.52 17.51,3.64 Q1.3 | 14.16,11.87 v14.46,11.57
  Bottom 0.3: v14.46,11.57 v17.51,8.52
GDR  (via drill 0.35)
  Top 0.3: v8.14,29.78 R2_EP_DR.2 | J3.2 11.19,22.77 10.73,22.77 v10.35,23.15 10.43,22.92 9.66,22.16 v9.66,18.96 | v8.29,7.68 6.39,7.68 3.42,4.71 3.42,4.41 Q3.1
  Bottom 0.3: v8.14,29.78 8.14,25.74 10.35,23.53 v10.35,23.15 | v8.29,7.68 8.29,9.44 8.9,10.04 8.9,18.2 v9.66,18.96
GND  (via drill 0.35)  (2 unrouted)
  Top 0.152: C25.2 42.89,31.91 42.89,30.85 43.42,30.31 43.42,26.96 42.58,26.12 42.58,25.89 SJ1.1 42.58,25.82 42.58,23.53 43.57,22.54 43.57,11.95 42.7,11.07 | 34.35,12.25 34.35,13.4 35.04,14.08 D4.1 34.58,13.7 32.07,16.22 31.15,16.22 29.06,14.12 | 34.35,12.25 34.35,11.72 EPD_C6.1 | IC4.8 44.18,9.82 43.72,9.82 IC4.9 43.72,9.89 43.72,10.04 42.7,11.07 | 42.7,11.07 42.66,11.11 37.4,11.11 36.87,11.65 EPD_C2.1 36.79,11.72 36.26,12.25 34.35,12.25 | 34.31,6.58 34.81,7.07 U1.9 | 34.31,6.58 34.28,6.54 33.9,6.54 U1.4 33.82,6.46 32.07,6.46 29.25,3.64 26.05,3.64 25.29,4.41 24.9,4.41 24.52,4.79 SW_ENT.1 24.45,4.79 24.45,4.94 24.9,5.4 24.9,5.62 | U1.6 35.72,7 34.81,7 U1.9 | U1.9 34.81,7.38 34.28,7.91 33.9,7.91 U1.1 | 34.31,6.58 35.42,5.47 35.42,4.79 SW_DN.1 | 24.9,5.62 24.9,6.92 C23.1 24.98,7 24.98,7.23 25.13,7.38 25.13,9.21 24.83,9.51 IC5.B3 | 24.9,5.62 25.74,5.62 26.12,5.24 28.56,5.24 TP_BAT_GND.TP 28.56,5.32 28.56,8.22 29.25,8.9 IC1.C1 | IC1.C1 29.32,8.9 29.32,9.21 IC1.B1 | IC1.C1 29.4,8.9 29.71,8.9 IC1.C2 29.78,8.9 30.09,8.9 IC1.C3 30.16,8.9 30.24,8.9 30.54,9.21 30.54,9.89 29.02,11.42 EPD_C8.1 | EPD_C9.1 26.73,11.65 27.27,11.11 28.64,11.11 29.17,11.65 EPD_C8.1 | 29.74,12.22 29.25,11.72 EPD_C8.1 | 29.74,12.22 29.78,12.25 30.54,12.25 31.08,11.72 31.76,11.72 EPD_C7.1 | C33.2 27.57,18.43 v27.57,19.27 27.57,20.33 27.8,20.56 C43.2 | 27.53,14.73 27.65,14.62 27.65,14.39 C1.2 27.72,14.31 28.87,14.31 29.06,14.12 | 27.53,14.73 27.42,14.84 26.96,14.84 26.5,14.39 25.97,14.39 C2.2 25.89,14.31 25.89,14.01 25.06,13.17 24.45,13.17 23.76,13.85 | 19.88,14.84 19.88,15.45 19.34,15.99 C1-EP-DR.2 19.42,15.99 19.8,16.37 19.8,17.97 C39.2
  Top 0.152: 19.88,14.84 19.88,14.39 C18.1 | 19.88,14.84 20.64,14.84 21.09,14.39 21.7,14.39 C17.1 21.78,14.31 21.78,14.08 22.01,13.85 23.76,13.85 | 23.76,13.85 23.84,13.85 24.14,14.16 24.14,14.31 C16.2 | v27.57,15.45 27.57,14.77 27.53,14.73 | 29.06,14.12 29.71,13.47 29.71,12.25 29.74,12.22 | R9.1 40.22,25.67 41.29,26.73 41.29,28.79 41.9,29.4 C24.1 | 35.5,32.3 35.72,32.52 35.72,33.13 U$1.P$B7 | U$1.P$F23 39.99,31.99 39.38,31.99 39.15,32.22 U$1.P$74 | U$1.P$87 35.5,28.71 35.5,29.78 U$1.P$74 | U$1.P$83 35.5,29.86 U$1.P$74 | U$1.P$74 36.72,29.78 36.72,28.71 U$1.P$88 36.79,28.71 37.86,28.71 U$1.P$89 | U$1.P$84 36.72,29.86 U$1.P$74 | U$1.P$85 37.86,29.86 37.33,30.39 U$1.P$74 | U$1.P$90 39.08,28.71 39.08,29.78 U$1.P$74 | U$1.P$86 U$1.P$74 | 36.11,31.69 35.5,31.08 U$1.P$79 | U$1.P$80 36.72,31.08 U$1.P$74 | U$1.P$81 37.86,31.08 U$1.P$74 | 38.54,31.61 39.08,31.08 U$1.P$82 | 35.5,32.3 U$1.P$75 | 35.5,32.3 U$1.P$74 | 36.11,31.69 36.64,32.22 U$1.P$76 | 36.11,31.69 U$1.P$74 | 38.54,31.61 37.93,32.22 U$1.P$77 | 38.54,31.61 U$1.P$74 | U$1.P$78 39.15,32.3 U$1.P$74 | v39.38,26.58 R9.1 | R9.1 | D1.2 21.93,18.58 21.63,18.58 21.17,19.04 21.17,19.87 23.07,21.78 23.07,22.69 EPD_C12.1 23.15,22.77 23.15,23.91 24.37,25.13 C6.2 24.75,25.13 25.51,25.89 28.26,25.89 | 30.69,32.37 30.54,32.52 30.54,33.67 C4.2 | 30.54,29.32 30.54,30.62 30.62,30.7 C8.2 30.69,30.77 30.69,31.15 | 30.54,29.32 30.54,28.87 C7.2 | 30.69,31.15 30.69,32.37 | 30.69,32.37 C22.2 | 32.6,31.23 32.6,32.22 C11.2 32.52,32.22 32.52,32.68 32.07,33.13 32.07,33.67 C3.2 | 32.6,31.23 32.6,30.77 | 32.6,30.77 C9.2 | C5.2 32.68,28.87 32.68,30.77 32.6,30.77 | 30.69,31.15 31.76,31.15 31.84,31.23 32.6,31.23
  Top 0.152: 28.18,24.75 28.18,23.61 27.72,23.15 EPD_C10.1 27.72,23.08 29.1,21.7 v29.1,20.79 | 28.18,24.75 28.18,25.36 C19.2 28.26,25.44 28.26,25.89 | R_TYPE_SEL.1 34.28,25.59 33.9,25.59 33.06,24.75 32.14,24.75 31.69,25.21 C12.2 | 28.18,24.75 31.31,24.75 31.69,25.13 C12.2 | 30.54,29.32 29.78,29.32 29.29,28.83 | 29.29,28.83 28.26,27.8 28.26,25.89 | v32.07,25.97 32.07,25.67 31.69,25.28 C12.2 | C15.2 17.97,20.79 19.26,20.79 19.72,20.33 20.18,20.33 20.41,20.56 20.41,20.79 C13.2 20.48,20.87 20.48,21.02 21.17,21.7 21.17,22.69 EPD_C11.1 21.25,22.77 21.25,24.83 C14.2 21.25,24.9 21.25,25.59 21.28,25.63 | 21.28,25.63 22.62,26.96 22.62,28.56 J4.B6 22.69,28.64 22.69,29.78 24.07,31.15 26.96,31.15 29.29,28.83 | 14.54,23.99 14.54,24.83 C21.2 14.46,24.9 13.86,25.51 13.7,25.51 13.25,25.97 13.25,30.01 | 14.54,23.99 14.54,23.38 15.15,22.77 16.22,22.77 EPD_C1.1 | 14.54,23.99 17.51,23.99 18.12,24.6 18.12,24.98 C20.2 | 14.92,31 C27.1 | 14.92,31 14.54,31 C32.1 | C42.2 15.61,33.29 15.61,33.44 15.38,33.67 13.47,33.67 13.25,33.44 13.25,33.29 C29.1 13.25,33.21 13.25,31 C34.1 13.17,30.92 13.02,30.92 12.9,30.81 | 14.92,31 14.92,30.24 14.88,30.2 | 14.88,30.2 14.69,30.01 13.25,30.01 | 13.25,30.01 13.02,30.01 12.79,30.24 12.79,30.7 12.9,30.81 | 5.4,32.52 5.4,31.3 5.24,31.15 R3.1 | 5.4,32.52 5.4,33.21 C38.1 | 7.49,33.02 7.61,32.9 8.14,32.9 | 7.49,33.02 7.45,33.06 7.45,33.21 C37.1 | 8.14,32.9 9.13,32.9 9.32,33.09 | 9.32,33.09 9.43,33.21 C31.1 | 10.73,33.21 10.35,33.21 10.04,32.9 9.51,32.9 9.32,33.09 | 10.73,33.21 11.34,33.21 C30.1 | 10.73,33.21 10.73,31.38 | 10.73,31.38 10.73,31 R1_USB.1 | 8.14,32.9 R2_EP_DR.1 8.14,30.92 7.99,30.92 7.68,30.62 6.77,30.62 R2_USB.2 6.69,30.54 6.54,30.39 6.54,30.31 5.24,29.02 4.64,29.02 4.48,28.87 4.48,25.89
  Top 0.152: v5.17,32.52 5.4,32.52 | 7.49,33.02 v7,32.52 | 12.9,30.81 12.33,31.38 10.73,31.38 | 14.88,30.2 15.07,30.01 15.99,30.01 20.33,25.67 21.25,25.67 21.28,25.63 | 8.33,5.28 7.68,5.93 6.54,5.93 TP_GND.TP | 8.33,5.28 8.37,5.24 8.37,2.12 7.61,1.36 7.45,1.36 IC2.D2 | 9.59,5.78 8.83,5.78 8.33,5.28 | 9.59,5.78 12.86,5.78 13.47,5.17 SW_UP.1 | 12.64,17.51 12.64,18.2 11.87,18.96 11.87,19.49 11.68,19.68 | 12.64,17.51 12.64,16.29 EPD_C5.1 | 11.68,19.68 11.64,19.72 11.26,19.72 J3.8 | 12.64,17.51 16.98,17.51 17.28,17.82 17.28,17.97 C10.2 | X1.4 1.59,27.04 1.74,27.04 2.81,25.97 2.96,25.97 X1.2 3.04,25.89 4.48,25.89 | 8.6,23.76 8.6,23.99 J3.MP1 8.52,24.06 8.52,24.6 7.23,25.89 4.48,25.89 | 8.6,23.76 8.6,11.04 J3.MP2 8.67,11.04 9.21,10.5 v9.59,10.5 | 8.6,23.76 11.57,23.76 11.87,23.46 11.87,20.03 11.72,19.87 11.72,19.72 11.68,19.68 | v9.59,7.53 9.59,5.78
  Bottom 0.152: v27.57,15.45 v27.57,19.27 v29.1,20.79 | v39.38,26.58 39.38,28.41 39.15,28.64 U$1.P$90 | v32.07,25.97 32.75,26.66 32.75,29.4 33.13,29.78 35.42,29.78 U$1.P$83 | v7,32.52 v5.17,32.52 | v9.59,10.5 v9.59,7.53
IMU_INT1  (via drill 0.35)
  Top 0.152: v33.36,29.09 33.36,29.55 33.97,30.16 U$1.P$N1 | v43.95,9.05 44.26,9.05 44.49,8.83 44.72,8.83 IC4.5
  Bottom 0.152: v33.36,29.09 33.36,17.21 35.88,14.69 40.14,14.69 41.9,12.94 41.9,9.36 42.2,9.05 v43.95,9.05
IMU_INT2  (1 unrouted)
LX1  (2 unrouted)
LX2  (2 unrouted)
N$1  (via drill 0.35)
  Top 0.152: v42.35,30.47 42.35,32.3 42.05,32.6 40.45,32.6 40.37,32.52 40.07,32.52 U$1.P$D23 | v31.46,31.76 31.61,31.76 32.07,32.22 C11.1
  Bottom 0.152: v42.35,30.47 42.35,31.3 40.14,33.51 32.83,33.51 32.14,32.83 32.14,32.45 v31.46,31.76
N$2  (via drill 0.35)  (1 unrouted)
  Top 0.152: v31.53,32.75 31.53,33.67 C3.1 | v14.01,26.12 14.01,27.72 14.08,27.8 L2.1
  Bottom 0.152: v31.53,32.75 28.33,32.75 28.03,32.45 16.98,32.45 16.9,32.52 15.84,32.52 14.01,30.7 v14.01,26.12
N$3
  Top 0.3: U$1.P$AD14 37.48,27.19 37.48,27.04 37.1,26.66 31.84,26.66 30.01,28.48 30.01,28.79 C7.1
N$4  (2 unrouted)
N$5  (2 unrouted)
N$6  (1 unrouted)
N$8  (via drill 0.35)
  Top 0.152: v40.98,31.69 40.98,30.62 40.6,30.24 U$1.P$N24 | v31.31,30.54 31.84,30.54 31.99,30.7 C9.1
  Bottom 0.152: v40.98,31.69 40.6,31.69 39.38,32.9 34.05,32.9 33.13,31.99 32.91,31.99 32.37,31.46 32.37,31.3 31.61,30.54 v31.31,30.54
N$9  (1 unrouted)
N$10  (1 unrouted)
N$12
  Top 0.152: L4.1 5.4,27.72 6.84,29.17 10.58,29.17 L3.2
N$13  (1 unrouted)
N$14  (1 unrouted)
N$15  (1 unrouted)
N$16  (1 unrouted)
N$17  (1 unrouted)
N$18
  Top 0.152: R18.1 36.87,25.67 38.09,25.67 R17.1
N$19  (1 unrouted)
N$20  (via drill 0.35)  (1 unrouted)
  Top 0.152: L5.2 13.63,12.86 v13.63,13.63 13.63,13.78 15.84,15.99 C2-EP-DR.2 | v7.07,3.8 5.47,3.8 Q3.3
  Bottom 0.152: v7.07,3.8 7.53,3.8 13.63,9.89 v13.63,13.63
N$21  (via drill 0.35)
  Top 0.152: v17.06,16.22 16.75,16.52 15.46,16.52 14.92,15.99 C2-EP-DR.1 | v20.56,17.28 21.93,15.91 v23,15.91 | v30.69,14.84 31.08,14.84 31.61,14.31 D2.1 | v37.4,14.08 D4.2
  Bottom 0.152: v17.06,16.22 17.28,16.22 18.5,17.44 20.41,17.44 v20.56,17.28 | v23,15.91 26.2,15.91 27.27,14.84 28.41,14.84 | v30.69,14.84 28.41,14.84 | v37.4,14.08 31.61,14.08 30.16,12.64 28.71,12.64 28.41,12.94 28.41,14.84
N$22  (2 unrouted)
N$23  (via drill 0.35)
  Top 0.152: v31.91,18.96 32.3,18.58 32.3,18.27 37.78,12.79 37.78,11.72 EPD_C2.2 | v17.28,25.97 15.07,25.97 v14.92,26.12 | v10.35,21.86 11.11,21.86 11.19,21.78 J3.4
  Bottom 0.152: v31.91,18.96 31.91,19.87 29.17,22.62 22.85,22.62 22.08,23.38 18.5,23.38 17.28,24.6 v17.28,25.97 | v14.92,26.12 10.65,21.86 v10.35,21.86
N$25  (via drill 0.35)
  Top 0.152: v15.38,24.6 15.53,24.45 17.51,24.45 17.67,24.6 17.67,25.44 17.82,25.59 18.5,25.59 19.42,24.68 19.42,23.68 18.5,22.77 17.28,22.77 EPD_C1.2 | v10.35,19.65 10.35,20.71 10.88,21.25 11.19,21.25 J3.5
  Bottom 0.152: v15.38,24.6 10.43,19.65 v10.35,19.65
N$26  (1 unrouted)
N$27  (via drill 0.35)
  Top 0.152: v32.83,9.44 32.83,11.65 EPD_C7.2 | v16.75,7.76 12.48,7.76 10.2,10.04 10.2,13.55 10.88,14.23 11.19,14.23 J3.19
  Bottom 0.152: v32.83,9.44 32.83,8.67 33.59,7.91 33.59,7 33.13,6.54 28.33,6.54 27.65,7.23 17.28,7.23 v16.75,7.76
N$28  (via drill 0.35)
  Top 0.152: v31.99,9.89 30.24,11.65 EPD_C8.2 | v13.4,14.54 12.41,14.54 11.64,13.78 11.26,13.78 J3.20
  Bottom 0.152: v31.99,9.89 31.99,9.05 33.29,7.76 33.29,7.15 32.98,6.84 28.49,6.84 27.8,7.53 20.64,7.53 13.63,14.54 v13.4,14.54
N$29  (1 unrouted)
N$30  (via drill 0.35)
  Top 0.152: v23,20.18 24.07,21.25 24.07,22.69 EPD_C12.2 | v22.62,13.25 20.71,13.25 20.64,13.32 16.29,13.32 15.07,12.1 15.07,11.26 14.77,10.96 13.32,10.96 12.56,11.72 11.26,11.72 J3.24
  Bottom 0.152: v23,20.18 23,16.83 22.31,16.14 22.31,13.55 v22.62,13.25
N$31  (1 unrouted)
N$32  (1 unrouted)
N$33  (1 unrouted)
OUT+  (via drill 0.35)
  Top 0.3: v27.19,5.85 27.19,7.76 24.98,9.97 24.83,9.97 IC5.A3 | v36.64,5.24 39.61,2.27 39.76,2.27 TP_OP.TP
  Bottom 0.3: v27.19,5.85 27.72,5.85 28.33,5.24 v36.64,5.24
P0.00/XL1  (via drill 0.35)  (1 unrouted)
  Top 0.152: v22.92,14.46 22.85,14.39 22.31,14.39 C17.2 | v40.83,13.09 41.74,13.09 41.9,12.94 X2.1
  Bottom 0.152: v22.92,14.46 26.43,14.46 28.56,12.33 33.74,12.33 34.5,13.09 v40.83,13.09
P0.01/XL2  (2 unrouted)
P0.13/1.5D  (via drill 0.35)  (1 unrouted)
  Top 0.152: v11.34,32.6 11.8,33.06 11.8,33.21 C30.2 | v3.95,31.84 3.26,31.84 2.58,31.15 R5.1
  Bottom 0.152: v11.34,32.6 7.99,32.6 7.23,31.84 v3.95,31.84
P0.14/1.5D  (via drill 0.35)  (1 unrouted)
  Top 0.152: v12.64,31.99 12.64,32.98 11.95,33.67 10.27,33.67 9.89,33.29 C31.2 | v2.35,28.64 2.35,28.87 2.12,29.09 2.12,29.55 2.35,29.78 2.5,29.78 R8.1
  Bottom 0.152: v12.64,31.99 14.16,31.99 14.46,32.3 14.46,32.9 14.16,33.21 4.41,33.21 2.35,31.15 v2.35,28.64
P1.01/1.6C  (via drill 0.35)
  Top 0.152: v32.75,25.36 33.44,26.05 34.58,26.05 34.96,25.67 R_PWR_EPD.1 | v29.02,13.25 25.97,13.25 21.02,8.29 21.02,6.16 18.2,3.34 18.2,3.11 16.6,1.51 Q1.1
  Bottom 0.152: v32.75,25.36 32.75,21.93 32.98,21.7 32.98,15.91 30.31,13.25 v29.02,13.25
P1.02/1.6C  (via drill 0.35)  (1 unrouted)
  Top 0.152: v13.86,32.6 13.7,32.75 13.7,33.21 C29.2 | v4.56,30.16 4.18,30.16 3.87,29.86 R7.1
  Bottom 0.152: v13.86,32.6 12.25,32.6 10.88,31.23 5.62,31.23 v4.56,30.16
PMIC_INT  (1 unrouted)
PREVGH  (via drill 0.35)
  Top 0.3: v25.13,11.49 25.97,12.33 27.04,12.33 27.65,11.72 EPD_C9.2 | v23.3,11.49 21.63,11.49 20.56,10.43 16.29,10.43 16.22,10.5 13.17,10.5 12.41,11.26 12.03,11.26 | 12.03,11.26 10.81,11.26 10.58,11.49 10.58,13.09 10.73,13.25 11.19,13.25 J3.21 | v31.84,21.25 31.84,20.1 D5.1 | v18.81,23.99 18.12,23.99 17.51,23.38 v15.46,23.38 | v12.03,11.11 12.03,11.26
  Bottom 0.3: v23.3,11.49 v25.13,11.49 | v31.84,21.25 31.15,21.25 29.4,23 23.07,23 22.08,23.99 v18.81,23.99 | v15.46,23.38 15.46,20.26 12.03,16.83 v12.03,11.11
PREVGL  (via drill 0.35)
  Top 0.3: v30.85,20.03 30.85,18.5 31.61,17.74 D2.2 | EPD_C11.2 20.18,22.69 v20.18,21.63 20.1,21.7 v16.75,21.7 | v12.71,13.25 11.72,12.25 11.26,12.25 J3.23
  Bottom 0.3: v20.18,21.63 21.93,21.63 22.08,21.47 29.4,21.47 v30.85,20.03 | v12.71,13.25 12.71,16.83 16.75,20.87 v16.75,21.7
RESE  (2 unrouted)
RESET  (2 unrouted)
RF  (via drill 0.35)  (1 unrouted)
  Top 0.152: C4.1 29.93,33.67 29.93,32.52 29.78,32.37 C22.1 29.71,32.37 v29.71,31.53 | v26.28,26.58 23.15,26.58 22.31,25.74 v22.31,22.24 | v19.42,22.77 19.42,23.23 19.72,23.53 19.72,24.83 16.75,27.8 L2.2
  Bottom 0.152: v29.71,31.53 29.71,31.08 28.56,29.93 28.56,28.87 v26.28,26.58 | v22.31,22.24 19.95,22.24 v19.42,22.77
SCL/2.4C  (via drill 0.35)  (3 unrouted)
  Top 0.152: v6.62,2.96 6.62,2.42 6.92,2.12 7,2.12 IC2.B1 | IC4.12 43.12,8.75 43.04,8.75 42.05,7.76 42.05,7.53 39.76,5.24 39.15,5.24 TP_SCL.TP 39,5.32 v37.55,5.32 37.55,6.08 36.18,7.45 35.8,7.45 U1.7
  Bottom 0.152: v6.62,2.96 8.37,2.96 9.82,4.41 36.72,4.41 37.55,5.24 v37.55,5.32
SDA/2.4C  (via drill 0.35)  (3 unrouted)
  Top 0.152: IC2.C1 7,1.74 5.85,1.74 3.72,3.87 2.73,3.87 2.58,4.03 2.58,7.84 4.02,9.28 8.83,9.28 9.05,9.05 TP_SDA.TP 9.13,8.98 v11.72,6.39 | v38.47,26.35 38.39,26.28 36.79,26.28 36.41,25.89 36.41,25.44 36.56,25.28 36.64,25.28 36.79,25.13 R18.2 | v42.51,9.66 42.51,8.67 41.74,7.91 41.74,7.68 41.06,7 37.1,7 36.18,7.91 35.8,7.91 U1.8 35.72,7.99 35.34,8.37 32.68,8.37 32.07,7.76 32.07,6.92 29.1,3.95 26.96,3.95 25.89,5.02 v25.44,5.02
  Bottom 0.152: v38.47,26.35 38.7,26.35 40.14,24.9 40.6,24.9 43.12,22.39 43.12,10.27 v42.51,9.66 | v11.72,6.39 16.52,6.39 17.89,5.02 v25.44,5.02
SWDCLK  (2 unrouted)
SWDIO  (2 unrouted)
SWO  (1 unrouted)
VBAT/1.2A  (via drill 0.35)
  Top 0.3: U1.3 33.9,7 33.9,7.45 U1.2 33.67,7.45 v32.68,7.45 | v16.6,30.39 15.76,30.39 C27.2 | v21.93,10.81 21.63,10.81 20.79,9.97 16.9,9.97 16.07,9.13 TP_VBAT.TP | v22.01,12.18 v23.99,12.18
  Bottom 0.3: v16.6,30.39 16.6,23.53 21.93,18.2 21.93,12.18 | v21.93,10.81 21.93,12.18 | v32.68,7.45 30.16,7.45 25.44,12.18 v23.99,12.18 | v22.01,12.18 21.93,12.18
VBAT/2.5C  (1 unrouted)
VBUS/1.5D  (via drill 0.35)
  Top 0.3: C43.1 26.89,20.56 27.19,20.87 27.19,20.94 27.42,21.17 28.26,21.17 28.41,21.02 28.41,18.2 27.95,17.74 25.74,17.74 24.98,18.5 24.52,18.5 D1.5 25.06,18.58 25.59,19.11 v25.59,24.6 | v22.69,30.7 21.25,32.14 15.99,32.14 15.15,32.98 15.15,33.21 C42.1 | v23.61,29.78 24.14,29.25 24.14,28.64 J4.B7
  Bottom 0.3: v22.69,30.7 v23.61,29.78 25.59,27.8 v25.59,24.6
VBUS/2.6D  (via drill 0.35)
  Top 0.3: v7.76,4.94 7.76,3.49 7.45,3.19 7.45,2.5 IC2.A2 | v13.47,23.76 13.47,24.83 C21.1 | v32.14,27.34 32.22,27.27 34.5,27.27 U$1.P$AD2 | v30.85,26.05 29.32,26.05 v28.94,25.67 | v5.93,30.62 5.85,30.7 5.85,33.21 C38.2
  Bottom 0.3: v7.76,4.94 7.76,7.23 7.61,7.38 7.61,9.44 8.45,10.27 8.45,18.73 10.43,20.71 | 10.43,20.71 v13.47,23.76 13.55,23.76 15.61,25.82 15.61,26.43 15.46,26.58 15.46,31.53 16.07,32.14 16.67,32.14 17.28,31.53 17.28,29.63 23.46,23.46 26.73,23.46 v28.94,25.67 | v30.85,26.05 v32.14,27.34 | v5.93,30.62 5.93,27.27 9.66,23.53 9.66,21.47 10.43,20.71
VREG  (via drill 0.35)  (2 unrouted)
  Top 0.3: IC1.A2 29.71,9.74 29.4,9.74 IC1.A1 29.25,9.74 29.17,9.74 | IC1.A2 | IC1.A3 30.09,9.74 29.86,9.74 IC1.A2 | v26.2,9.74 29.17,9.74 | v17.97,11.11 17.21,11.11 TP_VREG.TP | v18.81,16.83 18.81,17.97 C39.1 | v38.47,12.48 43.19,17.21 43.19,22.31 41.67,23.84 41.67,26.81 42.89,28.03 42.89,29.4 C24.2 | 29.17,9.74 v29.17,10.35
  Bottom 0.3: v26.2,9.74 25.29,9.74 23.46,7.91 21.17,7.91 v17.97,11.11 18.81,11.95 v18.81,16.83 | v38.47,12.48 34.5,12.48 32.6,10.58 29.4,10.58 v29.17,10.35